# EAGLE board AS3364_panelized (EAGLE 7.7.0)
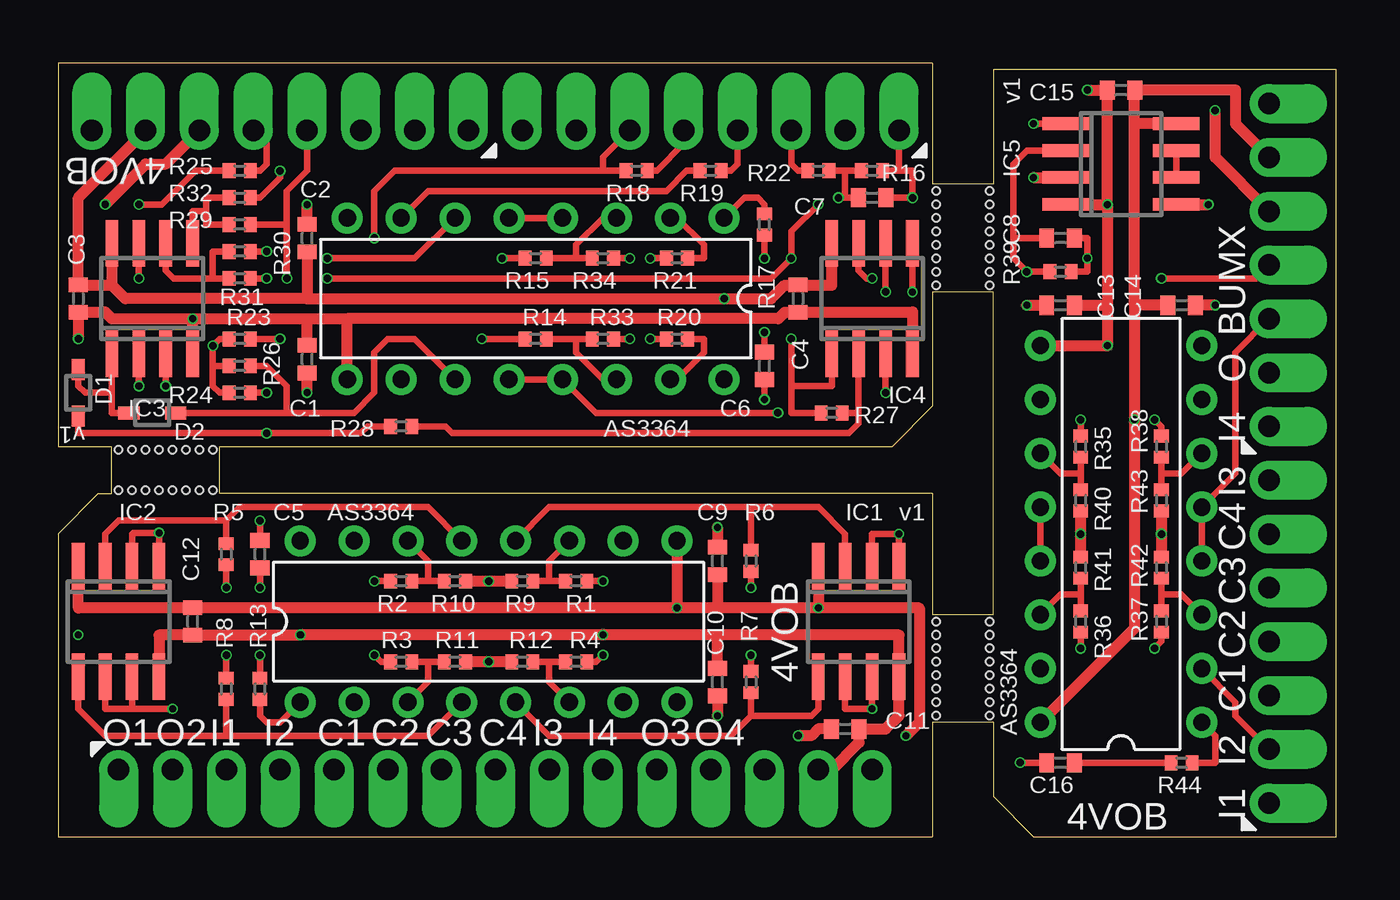
[diagram p0: board, top side]
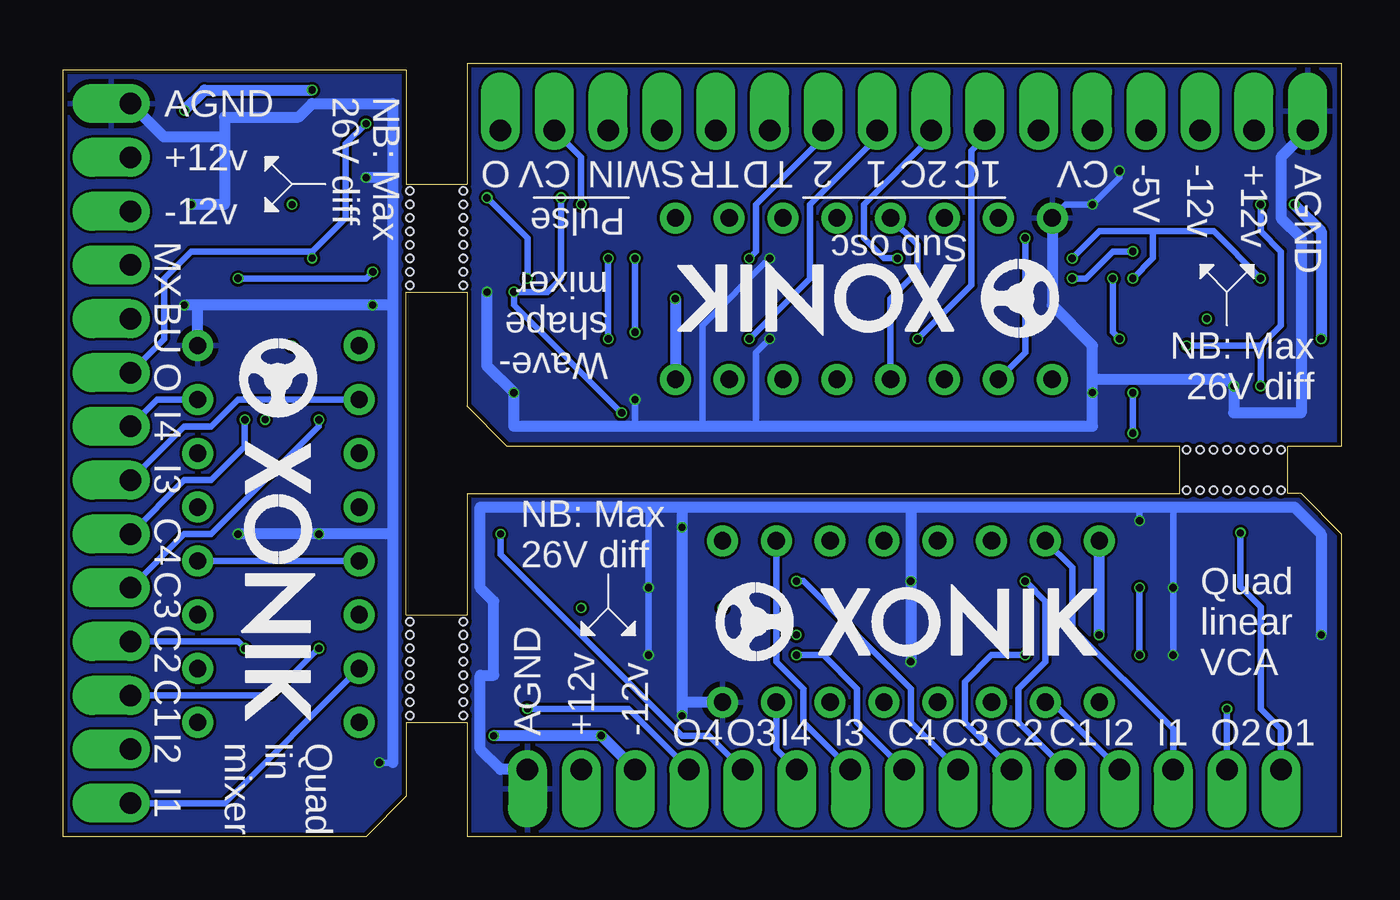
[diagram p1: board, bottom side, seen from below]

Size 60.33 x 36.51 mm. Coordinates in mm from the lower left corner, seen from the top.
Outline: 0,0 41.27,0 41.27,5.4 44.13,5.4 44.13,1.91 46.04,0 60.33,0 60.33,36.2 44.13,36.2 44.13,30.8 41.27,30.8 41.27,36.51 0,36.51 0,18.41 2.54,18.41 2.54,16.19 1.91,16.19 0,14.29 0,0
Outline: 39.37,18.41 41.27,20.32 41.27,25.72 44.13,25.72 44.13,10.48 41.27,10.48 41.27,16.19 7.62,16.19 7.62,18.41 39.37,18.41
Copper layers (1*16): Top 0.035mm / dielectric 1.6mm / Bottom 0.035mm
Design rules "jlcpcb-2layers": minimum track width 5mil, minimum drill 0.3mm, track to track 5mil, track to pad 5mil, pad to pad 5mil, via to via 5mil, smd to smd 5mil, copper to edge 0.2mm, drill to drill 6mil, minimum pad ring 10mil, minimum via ring 3mil, stop-mask expansion 4mil, vias tented up to drill 0mil, thermal gap 10mil
Holes 0.35 mm at 43.97,7.62 43.97,6.99 43.97,6.35 43.97,5.71 41.43,7.62 41.43,6.99 41.43,6.35 41.43,5.71 43.97,10.16 43.97,9.53 43.97,8.89 43.97,8.26 41.43,10.16 41.43,9.53 41.43,8.89 41.43,8.26 4.76,16.35 4.13,16.35 3.49,16.35 2.86,16.35 4.76,18.26 4.13,18.26 3.49,18.26 2.86,18.26 7.3,16.35 6.67,16.35 6.03,16.35 5.4,16.35 7.3,18.26 6.67,18.26 6.03,18.26 5.4,18.26 43.97,27.94 43.97,27.3 43.97,26.67 43.97,26.04 41.43,27.94 41.43,27.3 41.43,26.67 41.43,26.04 43.97,30.48 43.97,29.84 43.97,29.21 43.97,28.57 41.43,30.48 41.43,29.84 41.43,29.21 41.43,28.57

## Footprints (pad centres in the part's own frame; a part is rotated, then mirrored left to right if it is on the bottom)
C0402 = smd 0.7 x 0.9: 1 -0.65,0; 2 0.65,0
SOD323J = smd 1 x 0.6: 1 -1.1,0; 2 1.1,0
DIL16J = drill 0.813: 1 -8.89,-3.81; 2 -6.35,-3.81; 3 -3.81,-3.81; 4 -1.27,-3.81; 5 1.27,-3.81; 6 3.81,-3.81; 7 6.35,-3.81; 8 8.89,-3.81; 9 8.89,3.81; 10 6.35,3.81; 11 3.81,3.81; 12 1.27,3.81; 13 -1.27,3.81; 14 -3.81,3.81; 15 -6.35,3.81; 16 -8.89,3.81
SO08J = smd 0.6 x 2.2: 1 -1.905,-2.6; 2 -0.635,-2.6; 3 0.635,-2.6; 4 1.905,-2.6; 5 1.905,2.6; 6 0.635,2.6; 7 -0.635,2.6; 8 -1.905,2.6
R0402 = smd 0.6 x 0.7: 1 -0.5,0; 2 0.5,0
SIP-PIN15-1J = drill 1.016 offset: 1 -17.78,0; 2 -15.24,0; 3 -12.7,0; 4 -10.16,0; 5 -7.62,0; 6 -5.08,0; 7 -2.54,0; 8 0,0; 9 2.54,0; 10 5.08,0; 11 7.62,0; 12 10.16,0; 13 12.7,0; 14 15.24,0; 15 17.78,0
SIP-PIN08-1J = drill 1.016 offset: 1 -8.89,0; 2 -6.35,0; 3 -3.81,0; 4 -1.27,0; 5 1.27,0; 6 3.81,0; 7 6.35,0; 8 8.89,0
SIP-PIN07-1J = drill 1.016 offset: 1 -7.62,0; 2 -5.08,0; 3 -2.54,0; 4 0,0; 5 2.54,0; 6 5.08,0; 7 7.62,0

## Placement (x,y rotation side)
C1  100nF  [C0402]  11.75,22.54 270 top
C2  100nF  [C0402]  11.75,28.26 270 top
C3  100nF  [C0402]  0.95,25.4 90 top
C4  100nF  [C0402]  34.92,25.4 90 top
C5  5nF  [C0402]  9.53,13.34 270 top
C6  5nF  [C0402]  33.34,22.23 90 top
C7  33pF  [C0402]  38.42,30.16 180 top
C8  33pF  [C0402]  47.31,28.26 0 top
C9  100nF  [C0402]  31.11,13.02 90 top
C10  100nF  [C0402]  31.11,7.3 90 top
C11  100nF  [C0402]  37.15,5.08 0 top
C12  100nF  [C0402]  6.35,10.16 270 top
C13  100nF  [C0402]  47.31,25.08 180 top
C14  100nF  [C0402]  53.02,25.08 180 top
C15  100nF  [C0402]  50.16,35.24 0 top
C16  5nF  [C0402]  47.31,3.49 0 top
D1  [SOD323J]  0.95,20.95 270 top
D2  [SOD323J]  4.45,20 180 top
DA1  AS3364D  [DIL16J]  22.54,25.4 180 top
DA2  AS3364D  [DIL16J]  20.32,10.16 0 top
DA3  AS3364D  [DIL16J]  50.16,14.29 90 top
IC1  TL072JD  [SO08J]  37.78,10.16 180 top
IC2  TL072JD  [SO08J]  2.86,10.16 180 top
IC3  TL072JD  [SO08J]  4.45,25.4 0 top
IC4  TL072JD  [SO08J]  38.42,25.4 0 top
IC5  TL072JD  [SO08J]  50.16,31.75 270 top
R1  33k  [R0402]  24.45,12.06 180 top
R2  33k  [R0402]  16.19,12.06 0 top
R3  33k  [R0402]  16.19,8.26 0 top
R4  33k  [R0402]  24.45,8.26 180 top
R5  47k  [R0402]  7.94,13.34 90 top
R6  47k  [R0402]  32.7,13.02 90 top
R7  47k  [R0402]  32.7,7.3 270 top
R8  47k  [R0402]  7.94,6.99 270 top
R9  22k  [R0402]  21.91,12.06 0 top
R10  22k  [R0402]  18.73,12.06 180 top
R11  22k  [R0402]  18.73,8.26 180 top
R12  22k  [R0402]  21.91,8.26 0 top
R13  100R  [R0402]  9.53,6.99 270 top
R14  33k  [R0402]  22.54,23.5 0 top
R15  33k  [R0402]  22.54,27.3 0 top
R16  47k  [R0402]  38.42,31.43 180 top
R17  100R  [R0402]  33.34,28.89 90 top
R18  47k  [R0402]  27.3,31.43 180 top
R19  47k  [R0402]  30.8,31.43 180 top
R20  47k  [R0402]  29.21,23.5 0 top
R21  47k  [R0402]  29.21,27.3 0 top
R22  47k  [R0402]  35.88,31.43 180 top
R23  25k  [R0402]  8.57,23.5 180 top
R24  20k  [R0402]  8.57,20.95 0 top
R25  50k  [R0402]  8.57,31.43 180 top
R26  20k  [R0402]  8.57,22.23 0 top
R27  25k  [R0402]  36.51,20 180 top
R28  10k  [R0402]  16.19,19.37 0 top
R29  25k  [R0402]  8.57,28.89 180 top
R30  25k  [R0402]  8.57,27.62 180 top
R31  20k  [R0402]  8.57,26.35 0 top
R32  20k  [R0402]  8.57,30.16 180 top
R33  22k  [R0402]  25.72,23.5 180 top
R34  22k  [R0402]  25.72,27.3 180 top
R35  33k  [R0402]  48.26,18.41 270 top
R36  33k  [R0402]  48.26,10.16 90 top
R37  33k  [R0402]  52.07,10.16 90 top
R38  33k  [R0402]  52.07,18.41 270 top
R39  47k  [R0402]  47.31,26.67 0 top
R40  22k  [R0402]  48.26,15.88 90 top
R41  22k  [R0402]  48.26,12.7 270 top
R42  22k  [R0402]  52.07,12.7 270 top
R43  22k  [R0402]  52.07,15.88 90 top
R44  100R  [R0402]  53.02,3.49 0 top
SV1  [SIP-PIN15-1J]  20.64,3.17 0 top
SV2  [SIP-PIN08-1J]  30.8,33.34 180 top
SV3  [SIP-PIN08-1J]  10.48,33.34 180 top
U$1  [XONIK_LOGO_18]  29.53,8.31 0 bottom
U$2  [XONIK_LOGO_18]  13.34,27.25 180 bottom
U$3  [XONIK_LOGO_18]  52.01,23.5 270 bottom
U$4  MA07-1JP  [SIP-PIN07-1J]  57.15,26.99 90 top
U$5  MA07-1JP  [SIP-PIN07-1J]  57.15,9.21 90 top

## Library data of the parts
C1-C16 = rcl; SPICEPREFIX: C
D1 D2 = joakim; MPN: CDSOD323-T05C; OC_FARNELL: 1824860; OC_NEWARK: 79R6078
DA1-DA3 IC1-IC5 SV1-SV3 U$1-U$5 = joakim
R1-R44 = rcl; SPICEPREFIX: R

## Nets
+12V: C10.2 C11.2 C12.2 DA2.16 IC1.8 IC2.8 SV1.14
+12V1: C2.2 C3.2 C4.2 DA1.16 IC3.8 IC4.8 SV3.7
+12V2: C14.2 C15.2 DA3.16 IC5.8 U$4.6
-5V: R25.1 SV3.5
-12V: C9.1 C11.1 C12.1 DA2.9 IC1.4 IC2.4 SV1.13
-12V1: C1.1 C3.1 C4.1 DA1.9 IC3.4 IC4.4 SV3.6
-12V2: C13.1 C15.1 DA3.9 IC5.4 U$4.5
BUS: DA3.4 DA3.5 DA3.12 DA3.13 U$4.3
CV1: R2.1 SV1.5
CV2: R3.1 SV1.6
CV2_IN: DA2.3 R3.2 R11.2
CV2_IN1: DA3.3 R37.2 R42.2
CV3: R1.1 SV1.7
CV4: R4.1 SV1.8
CV5: R36.1 U$5.3
CV6: R35.1 U$5.5
CV7: R38.1 U$5.6
CV8: R37.1 U$5.4
GND: C5.1 C9.2 C10.1 DA2.8 R5.1 R6.1 R7.1 R8.1 R9.1 R10.1 R11.1 R12.1 SV1.15
GND1: C1.2 C2.1 C6.1 DA1.8 IC3.3 IC4.3 IC4.5 R32.1 R33.1 R34.1 SV3.8
GND2: C13.2 C14.1 C16.1 DA3.8 IC5.3 IC5.5 R40.1 R41.1 R42.1 R43.1 U$4.7
IN1: DA2.15 SV1.3
IN2: DA2.2 SV1.4
IN3: DA2.10 SV1.9
IN4: DA2.7 SV1.10
IN5: DA3.10 U$5.7
IN6: DA3.7 U$4.1
IN7: DA3.2 U$5.2
IN8: DA3.15 U$5.1
MIX: C8.1 IC5.2 R39.1 U$4.4
MIX_BUS: C7.2 DA1.4 DA1.5 DA1.12 DA1.13 IC4.6 R16.2 R22.1
N$1: DA1.1 R17.2
N$2: DA2.1 R13.2
N$3: C6.2 R17.1
N$4: DA2.4 IC2.5 R8.2
N$5: IC3.5 R29.2 R32.2
N$6: DA2.5 IC1.5 R7.2
N$7: D1.1 D2.2 IC3.1
N$8: IC3.2 R23.2 R24.1 R25.2 R26.1
N$9: DA3.1 R44.2
N$10: DA2.6 R4.2 R12.2
N$11: DA2.12 IC1.3 R6.2
N$12: DA2.11 R1.2 R9.2
N$13: DA2.13 IC2.3 R5.2
N$14: C5.2 R13.1
N$15: IC3.6 R30.2 R31.1
N$16: DA3.6 R38.2 R43.2
N$17: DA3.11 R35.2 R40.2
N$18: IC4.2 R27.1 R28.2
N$19: D1.2 R24.2 R28.1
N$20: DA3.14 R36.2 R41.2
N$21: DA2.14 R2.2 R10.2
N$22: C16.2 R44.1
NC1: IC5.6 IC5.7
OUT: C7.1 IC4.7 R16.1 SV2.1
OUT1: IC2.1 IC2.2 SV1.1
OUT2: IC2.6 IC2.7 SV1.2
OUT3: IC1.1 IC1.2 SV1.11
OUT4: IC1.6 IC1.7 SV1.12
OUT5: C8.2 IC5.1 R39.2 U$4.2
PAN_CV: R23.1 R29.1 SV3.4
PULSE_CV: IC4.1 R27.2 R30.1 SV2.2
PULSE_IN: R22.2 SV2.3
SAW: R19.1 SV2.4
SAW_CV: DA1.6 IC3.7 R31.2
SAW_IN: DA1.7 R19.2
SUB1: R20.1 SV2.8
SUB1_CV: R14.1 SV3.2
SUB1_CV_IN: DA1.14 R14.2 R33.2
SUB1_IN: DA1.15 R20.2
SUB2: R21.1 SV2.7
SUB2_CV: R15.1 SV3.1
SUB2_CV_IN: DA1.3 R15.2 R34.2
SUB2_IN: DA1.2 R21.2
TRI: R18.1 SV2.5
TRI_CV: D2.1 DA1.11 R26.2
TRI_IN: DA1.10 R18.2 SV2.6

## Tracks (layer width: path | path; a pad name or v marks a point on that pad's centre or on a via)
+12V  (via drill 0.33, 0.35)
  Top 0.508: IC2.8 4.76,9.53 6.35,9.53 | 31.11,9.53 39.69,9.53 IC1.8 39.69,5.71 39.05,5.08 C11.2 37.8,4.45 36.51,3.16 35.89,3.16 SV1.14 | 31.11,9.53 v25.72,9.53 v11.43,9.53 6.35,9.53 | C12.2 6.35,9.53 | C10.2 31.11,9.53
  Bottom 0.508: v11.43,9.53 DA2.16
+12V1  (via drill 0.35)
  Top 0.508: IC4.8 36.51,26.04 34.92,26.04 | 11.75,25.4 3.17,25.4 2.54,26.04 | 11.75,25.4 v31.43,25.4 33.66,25.4 34.29,26.04 34.92,26.04 | C4.2 34.92,26.04 | C2.2 11.75,25.4 | IC3.8 2.54,26.04 | 2.54,26.04 0.97,26.04 C3.2 0.95,30.16 SV3.7
  Bottom 0.508: v31.43,25.4 DA1.16
+12V2  (via drill 0.33)
  Top 0.508: 50.8,25.08 50.8,33.66 | 50.8,25.08 v50.8,19.68 50.8,9.84 DA3.16 | C14.2 50.8,25.08 | IC5.8 50.8,33.66 | 50.8,33.66 50.8,35.23 C15.2 55.56,35.24 55.56,33.66 U$4.6
-5V
  Top 0.305: SV3.5 9.84,32.7 9.84,31.75 9.53,31.43 R25.1
-12V  (via drill 0.33, 0.35)
  Top 0.508: IC1.4 v35.88,10.79 | IC2.4 0.95,10.79 6.35,10.79 | v35.88,10.79 31.11,10.79 | 31.11,10.79 v29.21,10.79 | v29.21,10.79 6.35,10.79 | C12.1 6.35,10.79 | C9.1 31.11,10.79 | C11.1 35.86,5.08 35.55,4.76 v34.92,4.76 | v40.01,4.76 40.64,5.4 40.64,10.79 v35.88,10.79 | DA2.9 v29.21,10.79
  Bottom 0.508: v40.01,4.76 36.2,4.76 v34.92,4.76 SV1.13
-12V1  (via drill 0.33, 0.35)
  Top 0.508: IC3.4 v6.35,24.45 | IC4.4 40.32,24.77 34.92,24.77 C4.1 34.29,24.75 33.99,24.45 13.65,24.45 | v6.35,24.45 11.75,24.45 | 11.75,24.45 13.65,24.45 | C1.1 11.75,24.45 | v6.35,24.45 2.54,24.45 2.22,24.77 0.95,24.77 v0.95,23.5 C3.1 | DA1.9 13.65,24.45 | SV3.6 5.08,31.75 4.13,31.75 v2.22,29.84
  Bottom 0.508: v2.22,29.84 0.95,28.57 v0.95,23.5
-12V2  (via drill 0.33, 0.35)
  Top 0.508: IC5.4 v49.53,29.84 | v49.53,29.84 49.53,25.08 | 49.53,25.08 v49.53,23.18 DA3.9 | C13.1 49.53,25.08 | U$4.5 54.61,32.07 v54.61,34.29 | v48.58,35.24 C15.1 49.53,35.23 v49.53,29.84
  Bottom 0.508: v54.61,34.29 53.66,35.24 v48.58,35.24
BUS
  Top 0.305: DA3.4 DA3.5 55.56,17.14 55.56,22.86 U$4.3 | DA3.13 DA3.12
  Bottom 0.305: DA3.4 DA3.13
CV1  (via drill 0.35)
  Top 0.305: R2.1 v14.92,12.06
  Bottom 0.305: v14.92,12.06 13.97,11.11 13.97,8.26 15.24,6.99 15.24,5.4 SV1.5
CV2  (via drill 0.35)
  Top 0.305: v14.92,8.57 15.24,8.26 R3.1
  Bottom 0.305: v14.92,8.57 16.51,8.57 17.78,7.3 17.78,5.4 SV1.6
CV2_IN
  Top 0.305: 17.46,8.26 17.46,7.3 DA2.3 | 17.46,8.26 R11.2 | R3.2 17.46,8.26
CV2_IN1
  Top 0.305: 52.07,11.43 53.02,11.43 DA3.3 | 52.07,11.43 R42.2 | R37.2 52.07,11.43
CV3  (via drill 0.35)
  Top 0.305: v25.72,12.06 R1.1
  Bottom 0.305: v25.72,12.06 25.4,12.06 20.32,6.99 20.32,5.4 SV1.7
CV4  (via drill 0.35)
  Top 0.305: R4.1 25.4,8.26 v25.72,8.57
  Bottom 0.305: v25.72,8.57 24.45,8.57 22.86,6.99 22.86,5.4 SV1.8
CV5  (via drill 0.35)
  Top 0.305: R36.1 v48.26,8.89
  Bottom 0.305: v48.26,8.89 50.48,6.67 U$5.3
CV6  (via drill 0.35)
  Top 0.305: v48.26,19.68 R35.1
  Bottom 0.305: U$5.5 54.61,14.29 53.34,14.29 48.26,19.37 v48.26,19.68
CV7  (via drill 0.35)
  Top 0.305: R38.1 52.07,19.37 v51.75,19.68
  Bottom 0.305: v51.75,19.68 51.75,18.41 53.34,16.83 54.61,16.83 U$5.6
CV8  (via drill 0.35)
  Top 0.305: v51.75,8.89 52.07,9.21 R37.1
  Bottom 0.305: v51.75,8.89 52.07,9.21 U$5.4
GND  (via drill 0.33, 0.35)
  Top 0.305: C5.1 v9.53,14.92 | R5.1 v7.94,11.75 | R8.1 v7.94,8.57 | R6.1 v32.7,11.75 | R7.1 v32.7,8.57
  Top 0.508: v31.11,14.61 C9.2 | C10.1 v31.11,5.71 | R11.1 v20.32,8.26 R12.1 | R10.1 v20.32,12.06 R9.1
  Bottom 0.305: v9.53,14.92 9.53,15.56 | 7.94,15.56 v7.94,11.75 v7.94,8.57 | 32.7,15.56 v32.7,11.75 v32.7,8.57
  Bottom 0.508: 31.11,15.56 32.7,15.56 40.64,15.56 40.64,11.75 40.01,11.11 40.01,7.62 40.64,7.62 40.64,4.13 39.69,3.17 SV1.15 | 31.11,15.56 20.32,15.56 | 20.32,15.56 9.53,15.56 7.94,15.56 2.22,15.56 0.95,14.29 v0.95,9.53 | 31.11,15.56 v31.11,14.61 31.11,6.35 | 31.11,6.35 v31.11,5.71 | 20.32,15.56 v20.32,12.06 v20.32,8.26 | DA2.8 31.11,6.35
  pour Bottom: 0,0 0,16.19 41.27,16.19 41.27,0
GND1  (via drill 0.33, 0.35)
  Top 0.305: C6.1 v33.34,20.64 | IC4.3 v39.05,20.95 | IC3.3 v5.08,21.27 | R32.1 9.53,30.16 10.48,31.11 v10.48,31.43 | v40.32,25.72 IC4.5 | R33.1 v26.99,23.5 | R34.1 v26.99,27.3
  Top 0.508: v11.75,20.95 C1.2 | C2.1 v11.75,29.84
  Bottom 0.305: v33.34,20.64 33.34,19.37 | DA1.8 13.02,29.84 v11.75,29.84 10.48,31.11 v10.48,31.43 | v26.99,23.5 27.62,22.86 27.62,19.37 | v26.99,27.3 30.16,24.13 30.16,19.37
  Bottom 0.508: v11.75,20.95 11.75,21.59 5.4,21.59 v5.08,21.27 5.08,20 1.91,20 1.91,28.26 2.86,29.21 2.86,32.07 SV3.8 | v40.32,25.72 40.32,22.23 v39.05,20.95 39.05,19.37 33.34,19.37 30.16,19.37 27.62,19.37 11.75,19.37 v11.75,20.95 | v11.75,20.95 11.75,23.18 13.65,25.08 DA1.8
  pour Bottom: 41.27,36.51 41.27,18.41 0,18.41 0,36.51
GND2  (via drill 0.33, 0.35)
  Top 0.305: C16.1 v45.4,3.49
  Top 0.508: v45.72,25.08 C13.2 | v54.61,25.08 C14.1 | v46.04,31.11 IC5.3 | R42.1 v52.07,14.29 R43.1 | R41.1 v48.26,14.29 R40.1 | IC5.5 v54.29,29.84
  Bottom 0.305: v45.4,3.49 44.77,3.49
  Bottom 0.508: 44.77,31.11 44.77,34.61 48.58,34.61 49.21,33.97 52.7,33.97 52.7,33.02 | 44.77,31.11 44.77,25.08 | 44.77,25.08 44.77,14.29 | 44.77,14.29 44.77,3.49 | 44.77,25.08 v45.72,25.08 53.98,25.08 | 44.77,31.11 v46.04,31.11 | 53.98,25.08 v54.61,25.08 | 52.7,33.02 52.7,29.84 v54.29,29.84 | 52.7,33.02 55.56,33.02 U$4.7 | 44.77,14.29 v48.26,14.29 v52.07,14.29 | DA3.8 53.98,25.08
  pour Bottom: 60.33,0 44.13,0 44.13,36.2 60.33,36.2
IN1
  Bottom 0.305: SV1.3 7.94,5.08 12.7,9.84 12.7,12.7 DA2.15
IN2
  Bottom 0.305: DA2.2 13.65,6.35 SV1.4
IN3
  Bottom 0.305: DA2.10 26.67,8.26 25.4,6.99 25.4,5.4 SV1.9
IN4
  Bottom 0.305: DA2.7 26.67,4.13 SV1.10
IN5
  Bottom 0.305: U$5.7 54.61,19.37 53.34,19.37 52.07,20.64 DA3.10
IN6
  Bottom 0.305: U$4.1 55.88,20.64 DA3.7
IN7
  Top 0.305: U$5.2 55.56,5.71 55.56,6.35 DA3.2
IN8
  Bottom 0.305: U$5.1 52.7,1.59 DA3.15
MIX  (via drill 0.35)
  Top 0.305: R39.1 v45.72,26.67 45.09,27.3 45.09,28.26 | IC5.2 45.72,32.38 45.09,31.75 45.09,28.26 | C8.1 45.09,28.26 | U$4.4 56.52,26.35 v52.07,26.35
  Bottom 0.305: v52.07,26.35 46.04,26.35 v45.72,26.67
MIX_BUS  (via drill 0.35)
  Top 0.305: v33.97,20 25.4,20 DA1.13 DA1.12 | DA1.4 DA1.5 | v39.05,25.72 IC4.6 | R22.1 37.15,31.43 | 37.15,31.43 R16.2 | 37.15,30.16 C7.2 | 37.15,31.43 37.15,30.16 | v36.83,30.16 37.15,30.16
  Bottom 0.305: DA1.5 20,27.94 20,26.67 21.27,25.4 DA1.12 | v33.97,20 39.05,25.08 v39.05,25.72 37.47,25.72 36.83,26.35 v36.83,30.16
N$1
  Top 0.305: DA1.1 32.38,30.16 33.02,30.16 33.34,29.84 R17.2
N$2
  Top 0.305: DA2.1 10.48,5.4 9.84,5.4 9.53,5.71 R13.2
N$3  (via drill 0.35)
  Top 0.305: R17.1 v33.34,27.3 | C6.2 v33.34,23.81
  Bottom 0.305: v33.34,23.81 v33.34,27.3
N$4
  Top 0.305: DA2.4 17.46,4.76 7.94,4.76 | 7.94,4.76 2.22,4.76 0.95,6.03 IC2.5 | R8.2 7.94,4.76
N$5
  Top 0.305: IC3.5 6.35,29.53 6.99,29.53 | R29.2 6.99,28.89 6.99,29.53 | R32.2 6.99,30.16 6.99,29.53
N$6
  Top 0.305: DA2.5 23.18,4.76 31.75,4.76 32.7,5.71 | IC1.5 35.88,6.03 35.56,5.71 32.7,5.71 | R7.2 32.7,5.71
N$7
  Top 0.305: D2.2 2.54,20 2.54,20.95 | D1.1 0.95,21.27 1.27,20.95 2.54,20.95 | IC3.1 2.54,20.95
N$8  (via drill 0.35)
  Top 0.305: IC3.2 v3.81,21.27 | R24.1 7.62,20.95 7.3,21.27 7.3,22.23 | 7.3,22.23 v7.3,23.18 7.62,23.5 R23.2 | R25.2 6.49,31.43 4.9,29.84 v3.81,29.84 | R26.1 7.3,22.23
  Bottom 0.305: 3.81,23.18 v7.3,23.18 | v3.81,21.27 3.81,23.18 | 3.81,23.18 2.86,24.13 2.86,27.62 3.81,28.57 v3.81,29.84
N$9
  Top 0.305: R44.2 54.61,3.49 54.61,4.76 DA3.1
N$10
  Top 0.305: R12.2 R4.2 23.18,8.26 23.18,7.3 DA2.6
N$11
  Top 0.305: 32.7,15.56 35.88,15.56 37.15,14.29 IC1.3 | 32.7,15.56 23.18,15.56 DA2.12 | R6.2 32.7,15.56
N$12
  Top 0.305: 23.18,12.06 23.18,13.02 DA2.11 | R1.2 23.18,12.06 | 23.18,12.06 R9.2
N$13
  Top 0.305: DA2.13 17.46,15.56 8.57,15.56 7.94,14.92 | IC2.3 2.22,14.29 2.86,14.92 7.94,14.92 | R5.2 7.94,14.92
N$14  (via drill 0.35)
  Top 0.305: R13.1 v9.53,8.57 | C5.2 v9.53,11.75
  Bottom 0.305: v9.53,11.75 v9.53,8.57
N$15
  Top 0.305: IC3.6 5.08,26.73 5.46,26.35 6.99,26.35 7.12,26.35 7.3,26.35 | R30.2 7.3,27.62 7.3,26.35 | R31.1 7.3,26.35
N$16
  Top 0.305: R43.2 R38.2 52.07,17.14 53.02,17.14 DA3.6
N$17
  Top 0.305: 48.26,17.14 47.31,17.14 DA3.11 | R35.2 48.26,17.14 | 48.26,17.14 R40.2
N$18
  Top 0.305: R27.1 37.78,20 | IC4.2 37.78,20 | R28.2 18.28,19.37 18.6,19.05 37.33,19.05 37.78,19.5 37.78,20
N$19  (via drill 0.35)
  Top 0.305: D1.2 0.95,19.05 v9.84,19.05 14.29,19.05 14.61,19.37 R28.1 | R24.2 v9.84,20.95
  Bottom 0.305: v9.84,19.05 v9.84,20.95
N$20
  Top 0.305: 48.26,11.43 47.31,11.43 DA3.14 | R36.2 48.26,11.43 | 48.26,11.43 R41.2
N$21
  Top 0.305: 17.46,12.06 17.46,13.02 DA2.14 | R2.2 17.46,12.06 | 17.46,12.06 R10.2
N$22
  Top 0.305: C16.2 R44.1
NC1
  Top 0.305: IC5.6 IC5.7
OUT  (via drill 0.35)
  Top 0.305: IC4.7 37.78,26.73 38.16,26.35 v38.42,26.35 | C7.1 v40.32,30.16 40.32,31.43 39.69,31.43 | SV2.1 39.69,31.43 | R16.1 39.69,31.43
  Bottom 0.305: v38.42,26.35 38.42,28.26 v40.32,30.16
OUT1  (via drill 0.33)
  Top 0.305: IC2.1 v4.76,14.35 3.55,14.35 3.49,14.29 IC2.2
  Bottom 0.305: v4.76,14.35 4.76,11.81 3.81,10.86 3.81,6.03 2.86,5.08 SV1.1
OUT2  (via drill 0.33)
  Top 0.305: IC2.7 3.49,6.03 | 3.49,6.03 v5.4,6.03 | IC2.6 2.22,6.03 3.49,6.03
  Bottom 0.305: v5.4,6.03 SV1.2
OUT3  (via drill 0.33)
  Top 0.305: IC1.1 v39.69,14.29 38.42,14.29 IC1.2
  Bottom 0.305: v39.69,14.29 39.69,13.34 31.11,4.76 29.84,4.76 SV1.11
OUT4  (via drill 0.33)
  Top 0.305: IC1.7 v38.42,6.03 37.15,6.03 IC1.6
  Bottom 0.305: v38.42,6.03 33.66,6.03 SV1.12
OUT5  (via drill 0.33)
  Top 0.305: R39.2 48.58,26.67 v48.58,27.3 48.58,28.26 C8.2 | IC5.1 v46.04,33.66
  Bottom 0.305: v46.04,33.66 46.99,32.7 46.99,29.21 48.58,27.62 | v48.58,27.3 48.58,27.62 | 48.58,27.62 54.29,27.62 55.56,26.35 55.56,23.5 U$4.2
PAN_CV  (via drill 0.35)
  Top 0.305: R29.1 10.79,28.89 | 10.79,28.89 10.79,30.48 11.75,31.43 SV3.4 | v10.79,26.35 10.79,28.89 | v10.48,23.5 R23.1
  Bottom 0.305: v10.48,23.5 10.79,23.81 v10.79,26.35
PULSE_CV  (via drill 0.35)
  Top 0.305: v34.61,23.5 34.61,21.27 | 34.61,21.27 36.51,21.27 IC4.1 | 34.61,21.27 34.61,20 R27.2 | v35.88,29.84 34.61,28.57 v34.61,27.3 33.66,26.35 v12.7,26.35 | R30.1 v9.84,27.62
  Bottom 0.305: v34.61,23.5 v34.61,27.3 | v12.7,26.35 12.06,26.35 10.79,27.62 v9.84,27.62 | v35.88,29.84 35.88,32.07 SV2.2
PULSE_IN
  Top 0.305: SV2.3 34.61,31.75 34.92,31.43 R22.2
SAW
  Top 0.305: SV2.4 32.07,31.75 31.75,31.43 R19.1
SAW_CV  (via drill 0.35)
  Top 0.305: v3.81,26.35 IC3.7 | R31.2 v9.84,26.35 | DA1.6 16.83,27.3 v12.7,27.3
  Bottom 0.305: v12.7,27.3 11.43,28.57 8.89,28.57 | v3.81,26.35 6.03,28.57 8.89,28.57 | v9.84,26.35 8.89,27.3 8.89,28.57
SAW_IN
  Top 0.305: R19.2 29.66,31.43 28.71,30.48 17.46,30.48 DA1.7
SUB1  (via drill 0.35)
  Top 0.305: v27.94,23.5 R20.1
  Bottom 0.305: SV2.8 21.91,33.02 25.08,29.84 25.08,26.35 v27.94,23.5
SUB1_CV  (via drill 0.35)
  Top 0.305: v20,23.5 R14.1
  Bottom 0.305: v20,23.5 17.46,26.04 17.46,32.38 16.83,33.02 SV3.2
SUB1_CV_IN
  Top 0.305: R14.2 24.45,23.5 | 24.45,23.5 R33.2 | 24.45,23.5 24.45,22.86 25.72,21.59 DA1.14
SUB1_IN
  Top 0.305: DA1.15 29.21,21.59 30.48,22.86 30.48,23.5 R20.2
SUB2  (via drill 0.35)
  Top 0.305: v27.94,27.3 R21.1
  Bottom 0.305: SV2.7 24.45,33.02 27.62,29.84 27.62,27.62 v27.94,27.3
SUB2_CV  (via drill 0.35)
  Top 0.305: v20.95,27.3 R15.1
  Bottom 0.305: SV3.1 19.37,33.02 22.54,29.84 22.54,28.26 21.59,27.3 v20.95,27.3
SUB2_CV_IN
  Top 0.305: DA1.3 25.72,29.21 24.45,27.94 24.45,27.3 | R15.2 24.45,27.3 | 24.45,27.3 R34.2
SUB2_IN
  Top 0.305: DA1.2 29.21,29.21 30.48,27.94 30.48,27.3 R21.2
TRI
  Top 0.305: R18.1 28.26,31.43 29.53,32.7 SV2.5
TRI_CV
  Top 0.305: 10.79,20 13.97,20 14.92,20.95 14.92,22.86 15.56,23.5 16.83,23.5 DA1.11 | R26.2 9.84,22.23 10.79,21.27 10.79,20 | 10.79,20 D2.1
TRI_IN  (via drill 0.35)
  Top 0.305: R18.2 25.72,31.43 | 25.72,31.43 15.88,31.43 14.92,30.48 v14.92,28.26 | SV2.6 25.72,32.07 25.72,31.43
  Bottom 0.305: DA1.10 14.92,22.86 v14.92,28.26

## Text on the board
tNames: v1 | 4VOB | MX | BU | O | AS3364 | v1 | I4 | I3 | AS3364 | v1 | C4 | 4VOB | C3 | AS3364 | C2 | C1 | O1 | O2 | I1 | I2 | C1 | C2 | C3 | C4 | I3 | I4 | O3 | O4 | I2 | 4VOB | I1
bNames: NB: Max / 26V diff | AGND | AGND | +12v | -12v | -5V | CV | 1C | 2C | 1 | 2 | TD | TR | SW | IN | CV | O | +12v | Pulse | -12v | Sub osc | MX | Wave- / shape / mixer | BU | NB: Max / 26V diff | O | I4 | I3 | C4 | NB: Max / 26V diff | C3 | C2 | Quad / linear / VCA | C1 | -12v | +12v | AGND | I2 | O1 | O2 | I1 | I2 | C1 | C2 | C3 | C4 | I3 | I4 | O3 | O4 | Quad / lin / mixer | I1